# Altium PCB RSD_M1_MOTORCYCLE_UNIT_V2.PcbDoc
Units mm, origin at the board's own origin, x right, y up, seen from the top; angles counter-clockwise.
Board outline 67.4 x 33.8 mm, 4 copper layers (Top Layer, Signal Layer 1, Signal Layer 2, Bottom Layer), stack 0.778 mm thick; 54 components, 46 nets, 195 pads, 91 vias.
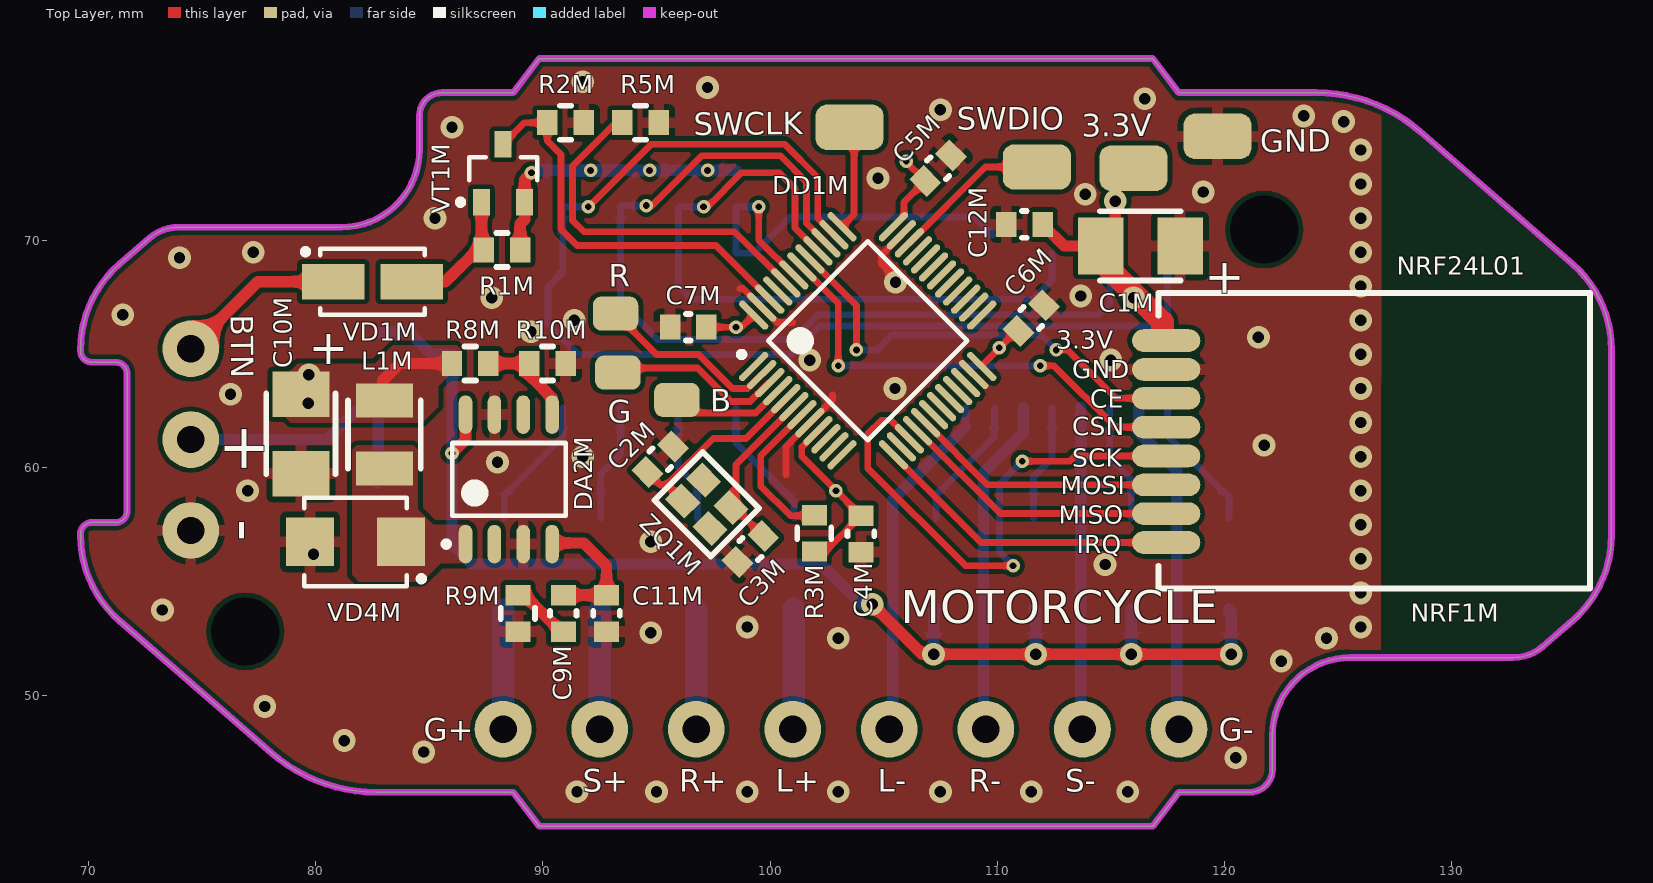
[diagram p0: Top Layer view]
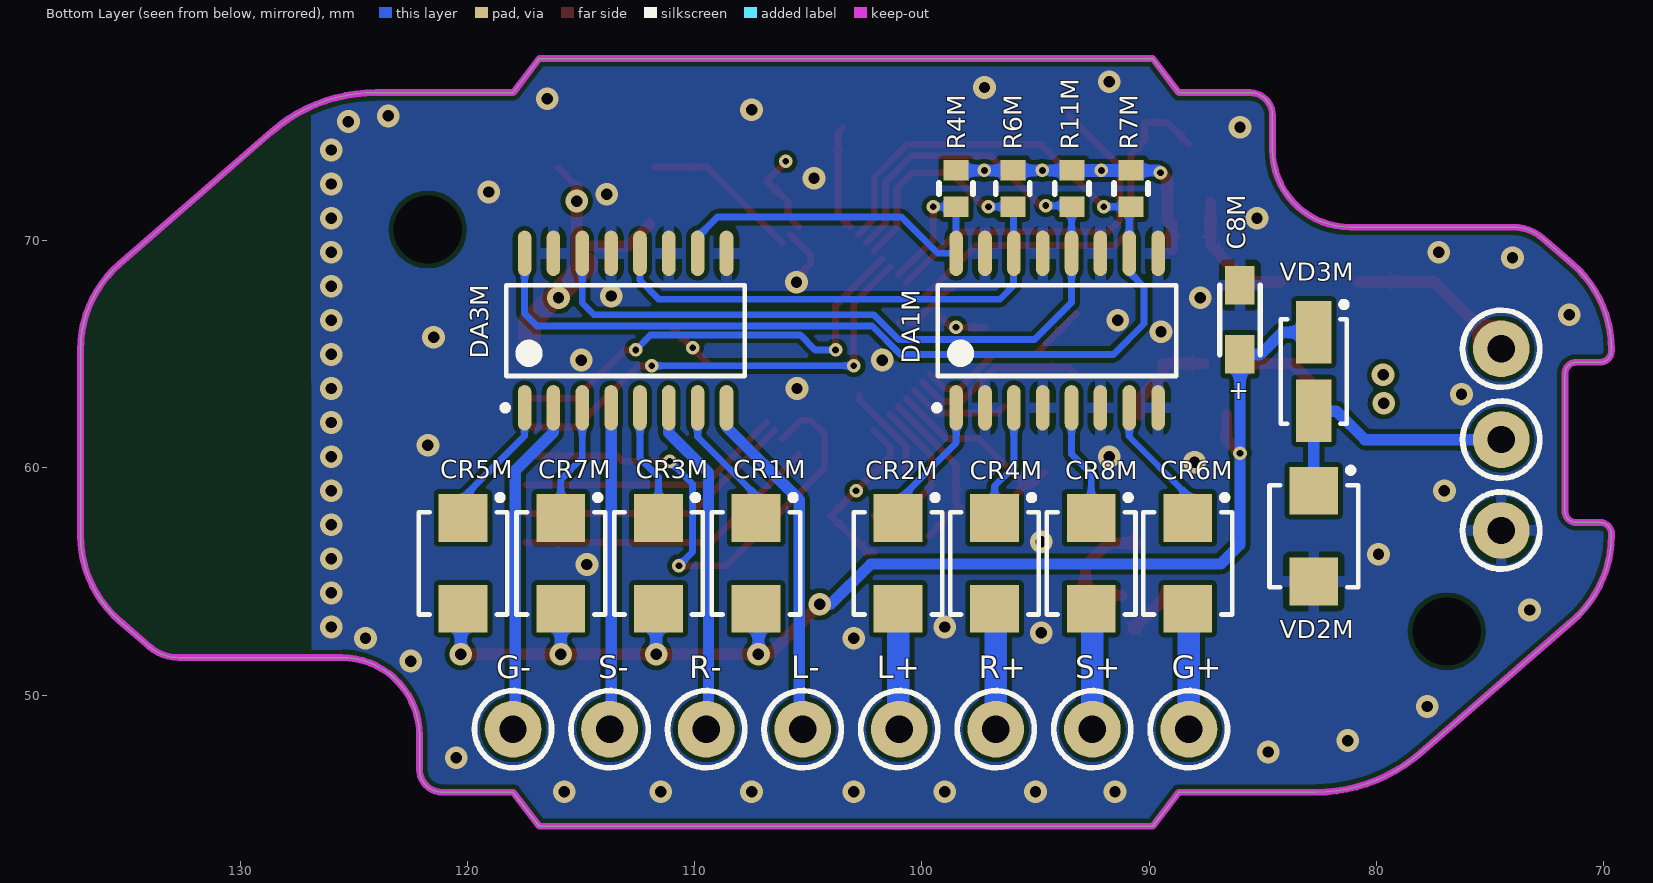
[diagram p1: Bottom Layer view, seen from below]
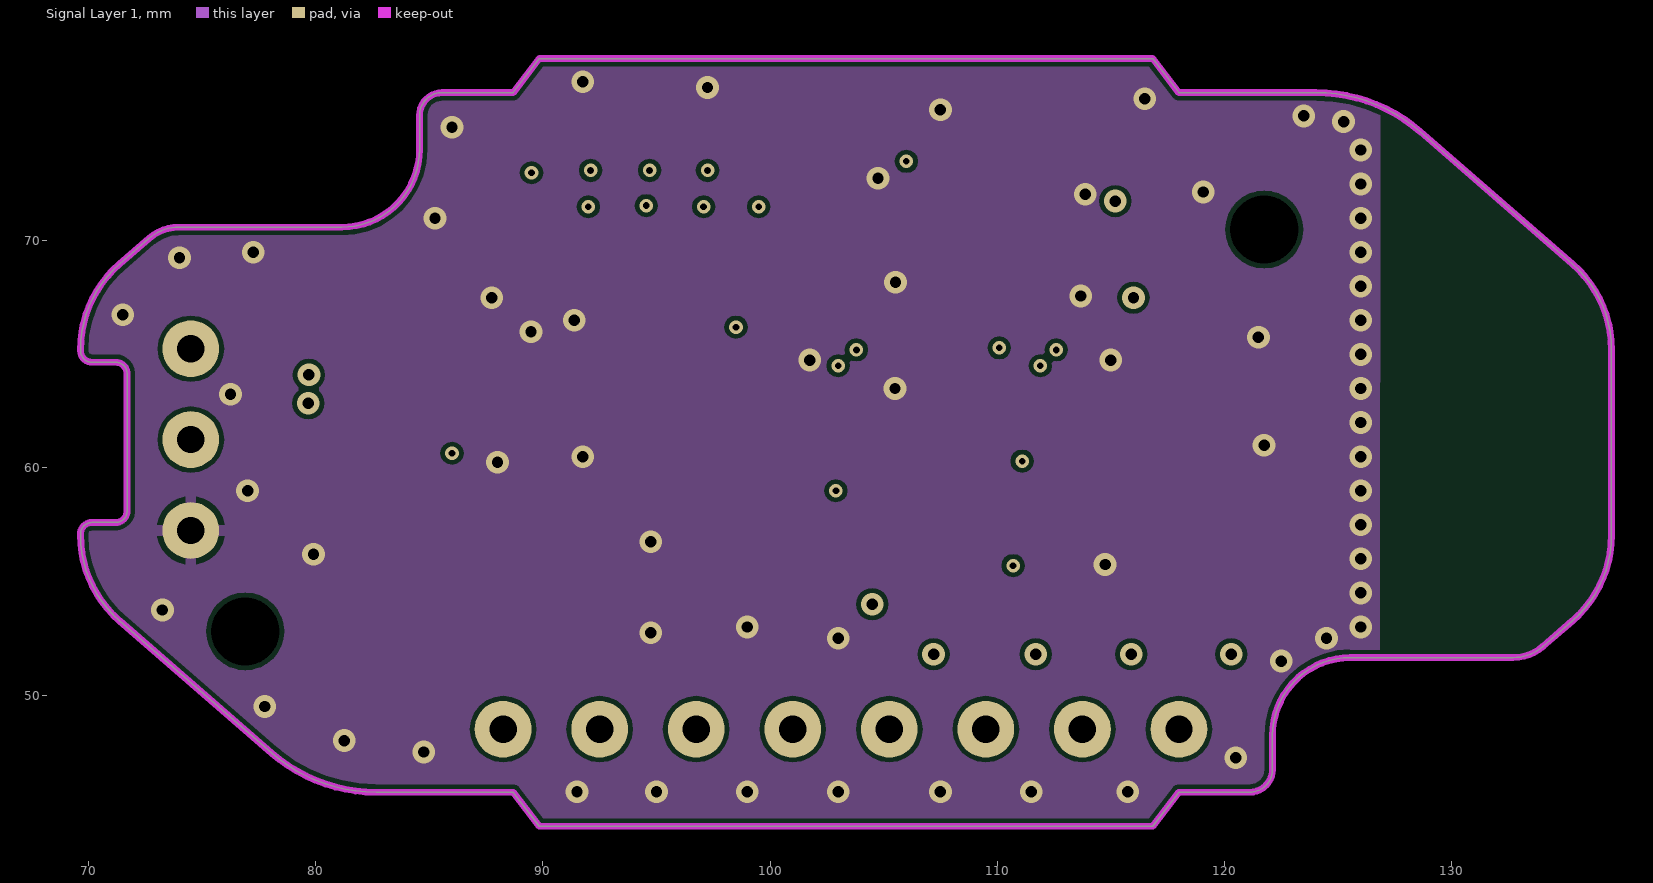
[diagram p2: Signal Layer 1]
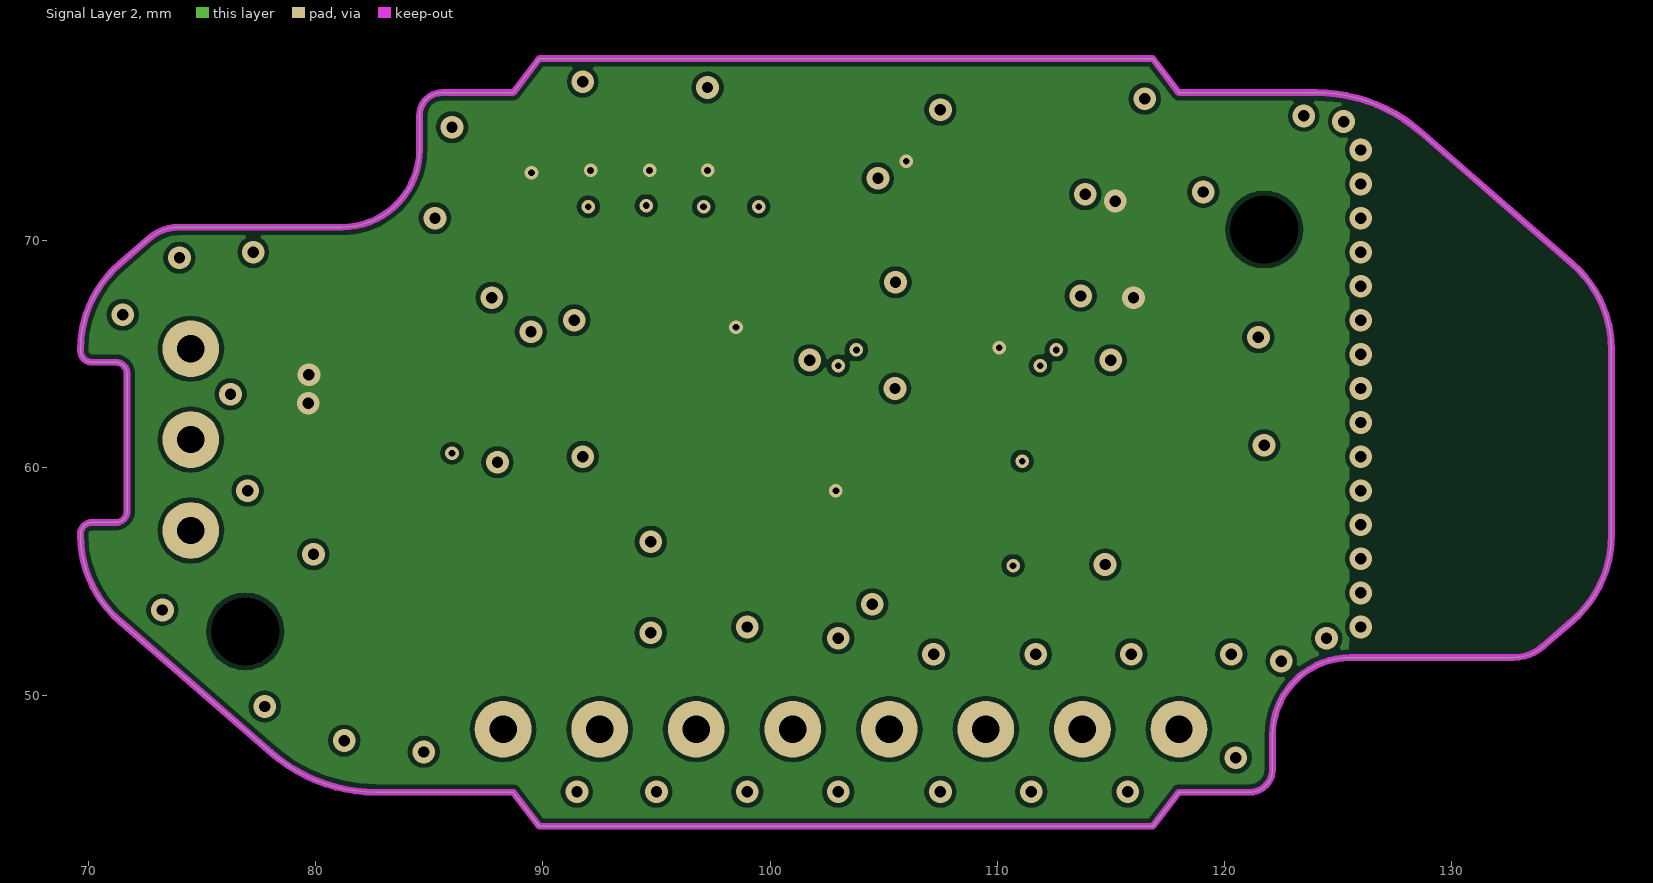
[diagram p3: Signal Layer 2]
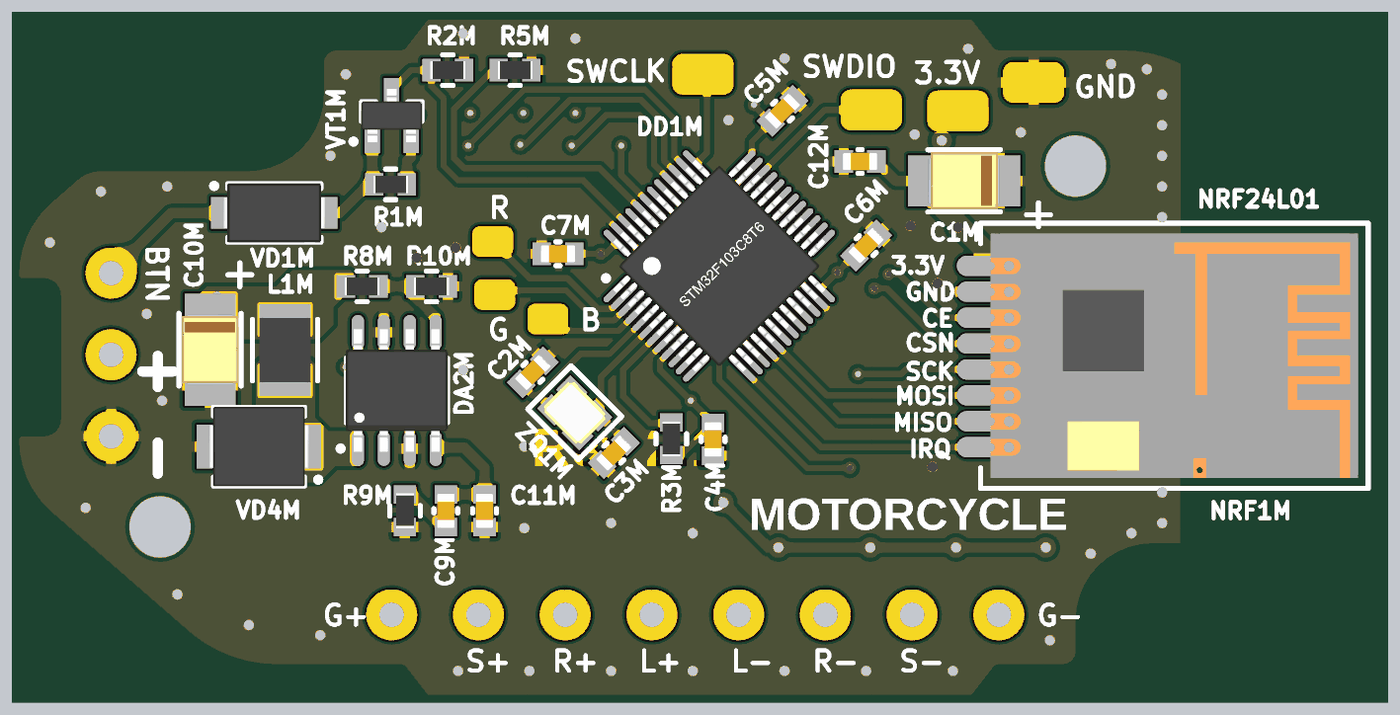
[diagram p4: 3D render of the assembled board from above, using the file's embedded part models]
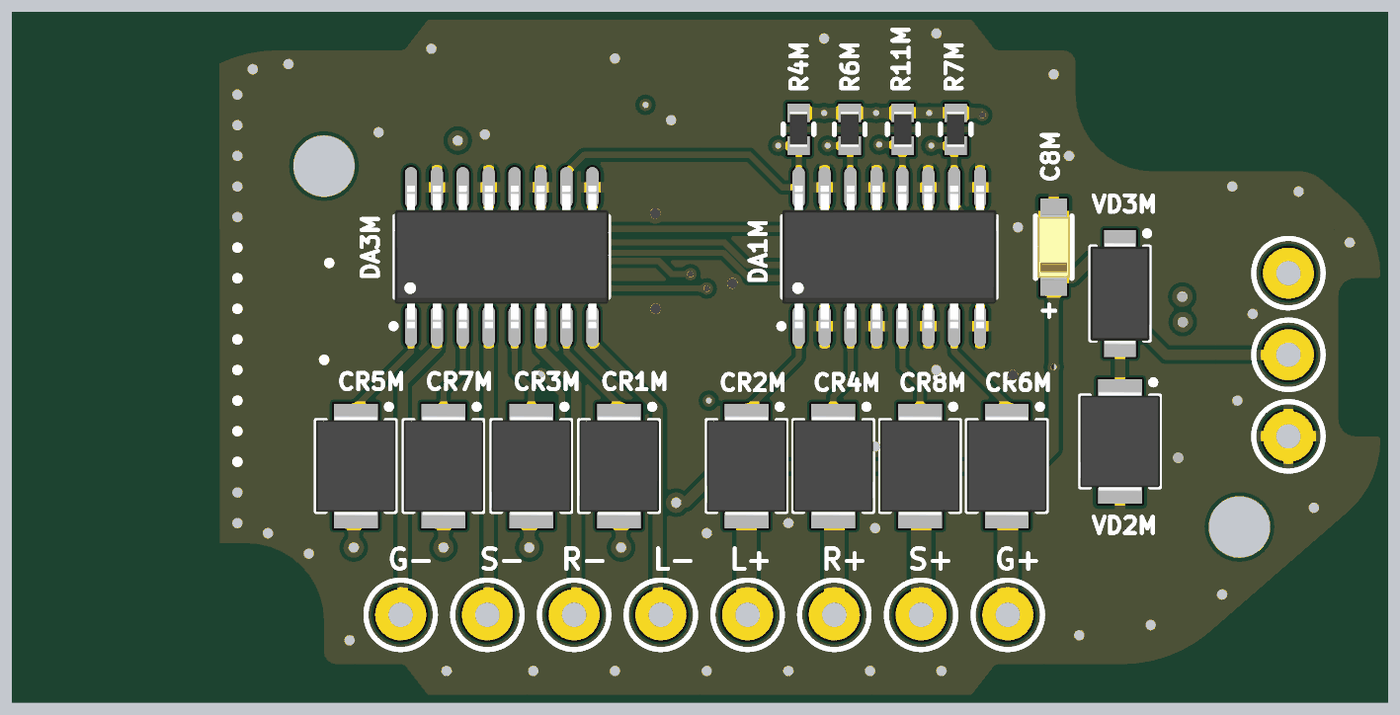
[diagram p5: 3D render of the assembled board from below, using the file's embedded part models]

## Layer stack, top to bottom
Top Solder: solder mask 0.0102, Solder Resist, Dk 3.5
Top Layer: signal copper 0.0356
Dielectric 1: core 0.254, FR-4, Dk 4.2
Signal Layer 1: signal copper 0.036
Dielectric 3: prepreg 0.127, Dk 4.2
Signal Layer 2: signal copper 0.036
Dielectric 2: core 0.254, Dk 4.2
Bottom Layer: signal copper 0.0356
Bottom Solder: solder mask 0.0102, Solder Resist, Dk 3.5

## Board outline
69.644,57.101 cw(c70.144,57.101) 70.144,57.601 71.194,57.601 ccw(c71.194,58.101) 71.694,58.101 71.694,64.154 ccw(c71.194,64.154) 71.194,64.654 70.144,64.654 cw(c70.144,65.154) 69.644,65.154 69.644,65.209 cw(c74.644,65.209) 71.364,68.982 72.663,70.112 cw(c73.975,68.602) 73.975,70.602 81.144,70.602 ccw(c81.144,74.027) 84.569,74.027 84.569,75.527 cw(c85.569,75.527) 85.569,76.527 88.685,76.527 89.844,78.027 116.844,78.027 118.004,76.527 124.028,76.527 cw(c124.028,69.527) 128.62,74.81 135.325,68.982 cw(c132.044,65.209) 137.044,65.209 137.044,57.046 cw(c132.044,57.046) 135.325,53.272 134.025,52.143 cw(c132.713,53.652) 132.713,51.652 125.544,51.652 ccw(c125.544,48.227) 122.119,48.227 122.119,46.727 cw(c121.119,46.727) 121.119,45.727 118.004,45.727 116.844,44.227 113.594,44.227 93.094,44.227 89.844,44.227 88.685,45.727 82.661,45.727 cw(c82.661,52.727) 78.068,47.444 71.364,53.272 cw(c74.644,57.046) 69.644,57.046

## Design rules (kind name [scope] priority, off if disabled: settings)
Clearance [All] p1: gap=0.1 ignorepadtopadclearanceinfootprint=FALSE except(0.2: Arc-Poly Track-Poly SMDPad-Poly THPad-Poly Via-Poly Fill-Poly Poly-Poly Poly-Region Poly-Text Poly-Hole)
ComponentClearance [All] p1: gap=0.1 collisioncheckmode=3 verticalgap=0.254 showdistances=FALSE
PolygonConnect [All] p1: thpad.connectstyle=Relief thpad.reliefconductorwidth=0.5 thpad.reliefentries=4 thpad.polygonreliefangle="90 Angle" thpad.airgapwidth=0.254 smdpad.connectstyle=Relief smdpad.reliefconductorwidth=0.5 smdpad.reliefentries=4 smdpad.polygonreliefangle="90 Angle" smdpad.airgapwidth=0.254 via.connectstyle=Direct via.reliefconductorwidth=0.254 via.reliefentries=4 via.polygonreliefangle="90 Angle" via.airgapwidth=0.254
RoutingVias [InNet('GND')] p1: holewidth=0.711 width=1.27 viastyle="Through Hole" minholewidth=0.711 minwidth=1.27 maxholewidth=0.711 maxwidth=1.27
SolderMaskExpansion [All] p1: expansion=0.102
Width [All] p1: maxlimit=5 minlimit=0.1 preferedwidth=0.3
29 further rules are at their usual default settings.

## Classes and differential pairs
component class RSD_M1_MOTORCYCLE_UNIT_V2: C1M C2M C3M C4M C5M C6M C7M C8M C9M C10M C11M C12M CR1M CR2M CR3M CR4M CR5M CR6M CR7M CR8M DA1M DA2M DA3M DD1M G- L1M L+ L- NRF1M R1M R2M R3M R4M R5M R6M R7M R8M R9M R10M R11M R+ R- S+ S- VD1M VD2M VD3M VD4M VT1M ZQ1M ""

## Components (designator, comment, footprint, x,y, rotation, side; value= is the part's Value field where it differs from the comment)
C1M "100 uf" tantal_case_B 116.3,69.775 r180 top value=T491B107M006AT
C2M "Capacitor" CAP0603 95.167,60.385 r225 top value="10 pF"
C3M "Capacitor" CAP0603 99.134,56.434 r45 top value="10 pF"
C4M "Capacitor" CAP0603 104,57.1 r90 top value="0.1 uF"
C5M "Capacitor" CAP0603 107.4,73.2 r225 top value="0.1 uF"
C6M "Capacitor" CAP0603 111.5,66.6 r225 top value="0.1 uF"
C7M "Capacitor" CAP0603 96.4,66.2 r0 top value="0.1 uF"
C8M "Capacitor_Polar" tantal_case_A 86,66.524 r90 bottom value=10uF
C9M "Capacitor" CAP0603 90.9,53.6 r90 top value="22 nF"
C10M "100 uf" tantal_case_B 79.35,61.5 r270 top value=T491B107M006AT
C11M "Capacitor" CAP0603 92.8,53.6 r90 top value="220 pF"
C12M "Capacitor" CAP0603 111.2,70.725 r180 top value="0.1 uF"
CR1M "NSIC20XX" SMB1 107.3,55.8 r270 bottom value=NSIC2050
CR2M "NSIC20XX" SMB1 101.05,55.8 r270 bottom value=NSIC2050
CR3M "NSIC20XX" SMB1 111.6,55.8 r270 bottom value=NSIC2050
CR4M "NSIC20XX" SMB1 96.8,55.8 r270 bottom value=NSIC2050
CR5M "NSIC20XX" SMB1 120.2,55.8 r270 bottom value=NSIC2050
CR6M "NSIC20XX" SMB1 88.3,55.8 r270 bottom value=NSIC2050
CR7M "NSIC20XX" SMB1 115.9,55.8 r270 bottom value=NSIC2050
CR8M "NSIC20XX" SMB1 92.55,55.8 r270 bottom value=NSIC2050
DA1M "TLP291-4" SOP16 94.05,66.05 r90 bottom
DA2M "LD5973AD" SOIC-8 88.5,59.5 r90 top
DA3M "TLP291-4" SOP16 113.05,66.05 r90 bottom
DD1M "STM32F103C8Tx" STM32F103C8T6 104.3,65.6 r45 top value=STM32F103C8T6
G+ "WIRE_CONNECT" WIRE_CONNECT 88.25,48.5 r180 bottom (schematic designator X7M)
G- "WIRE_CONNECT" WIRE_CONNECT 118,48.5 r180 bottom (schematic designator X8M)
L1M "coil" LQH3N 83.025,61.475 r90 top value="22 uH LQH3N" (schematic designator L1)
L+ "WIRE_CONNECT" WIRE_CONNECT 101,48.5 r180 bottom (schematic designator X3M)
L- "WIRE_CONNECT" WIRE_CONNECT 105.25,48.5 r180 bottom (schematic designator X4M)
NRF1M "NRF24L01" NRF24L01 118.6,61.2 r270 top
R1M "Resistor" Res0603 88.2,69.6 r180 top value="100 kOm"
R2M "Resistor" Res0603 91,75.2 r0 top value="100 kOm"
R3M "Resistor" Res0603 101.95,57.125 r270 top value="10 kOm"
R4M "Resistor" Res0603 98.5,72.3 r90 bottom value="1 kOm"
R5M "Resistor" Res0603 94.3,75.2 r0 top value="10 kOm"
R6M "Resistor" Res0603 96,72.3 r90 bottom value="1 kOm"
R7M "Resistor" Res0603 90.8,72.3 r90 bottom value="1 kOm"
R8M "Resistor" Res0603 86.8,64.6 r0 top value="5.6 kOm"
R9M "Resistor" Res0603 88.9,53.6 r270 top value="4.7 kOm"
R10M "Resistor" Res0603 90.2,64.6 r0 top value="3.3 kOm"
R11M "Resistor" Res0603 93.4,72.3 r90 bottom value="1 kOm"
R+ "WIRE_CONNECT" WIRE_CONNECT 96.75,48.5 r180 bottom (schematic designator X5M)
R- "WIRE_CONNECT" WIRE_CONNECT 109.5,48.5 r180 bottom (schematic designator X6M)
S+ "WIRE_CONNECT" WIRE_CONNECT 92.5,48.5 r180 bottom (schematic designator X9M)
S- "WIRE_CONNECT" WIRE_CONNECT 113.75,48.5 r180 bottom (schematic designator X10M)
VD1M "Diode" SMA-F 82.5,68.2 r0 top value=SS14
VD2M "Suppressor" SMB1 82.75,57 r270 bottom value=SMBJ18A
VD3M "Diode" SMA-F 82.75,64.25 r270 bottom value=SS14
VD4M "Schottky" SMB1 81.75,56.75 r180 top value=STPS340
VT1M "MOSFET-P" "SOT 23" 88.25,72.975 r90 top value=SI2301
X2M "WIRE_CONNECT" WIRE_CONNECT 74.5,65.25 r180 bottom
X11M "WIRE_CONNECT" WIRE_CONNECT 74.5,61.25 r180 bottom
X12M "WIRE_CONNECT" WIRE_CONNECT 74.5,57.25 r180 bottom
ZQ1M "Qartz" crystal 97.217,58.405 r135 top value=NX2520SA-16MHZ

## Footprints (in the part's own frame and the unit in brackets; to place one, negate y for a bottom-side part, rotate by r counter-clockwise, add the part's x,y. Pads: shape width x height; smd on the part's side, far side on the other; paste and mask are expansions set on the pad)
CAP0603 [mm]
  rect 0.9x1.1 smd: 1(-0.8,0) 2(0.8,0)
  silkscreen extent -0.1,-0.58 0.1,0.58, body extent -0.85,-0.43 0.85,0.43, height 0.9
crystal [mm]
  rect 1.2x1 smd: 1(-0.85,-0.65) 2(0.85,0.65) 3(0.85,-0.65) 4(-0.85,0.65)
  silkscreen extent -1.75,-1.5 1.75,1.5, body extent -1.3,-1.05 1.3,1.05, height 0.55
LQH3N [mm]
  rect 1.5x2.5 smd: 1(-1.5,0) 2(1.5,0)
  silkscreen extent -1.5,-1.6 1.5,1.6, body extent -1.6,-1.25 1.6,1.25, height 1.55
NRF24L01 [mm]
  oval 1x3 smd: 1(-4.41,-1.16) 2(-3.14,-1.16) 3(-1.87,-1.16) 4(-0.6,-1.16) 5(0.67,-1.16) 6(1.94,-1.16) 7(3.21,-1.16) 8(4.48,-1.16)
  silkscreen extent -6.5,-1.5 6.5,17.5, body extent -6,-1 6,17, height 0.8
Res0603 [mm]
  rect 0.9x1.1 smd: 1(-0.8,0) 2(0.8,0)
  silkscreen extent -0.25,-0.75 0.25,0.75, body extent -0.85,-0.43 0.85,0.43, height 0.5
SMA-F [mm] "Molded Diode, 2-Leads, Body 4,30x2,70mm, IPC Medium Density"
  rect 2.75x1.55 smd: 1(-1.725,0) 2(1.725,0)
  silkscreen extent -3.07,-1.45 2.3,1.45, body extent -2.52,-1.45 2.52,1.45, height 2.4
SMB1 [mm] "Molded Diode, 2-Leads, Body 4,25x3,60mm, IPC Medium Density"
  rect 2.1x2.15 smd: 1(-2,0) 2(2,0)
  silkscreen extent -3.02,-1.95 2.25,1.95, body extent -2.47,-1.95 2.47,1.95, height 1.8
SOIC-8 [mm] "SOIC, 8-Leads, Body 4,90x3,90mm, Pitch 1,27mm, IPC Medium Density"
  oval 1.7x0.6 smd: 1(-2.85,1.905) 2(-2.85,0.635) 3(-2.85,-0.635) 4(-2.85,-1.905) 5(2.85,-1.905) 6(2.85,-0.635) 7(2.85,0.635) 8(2.85,1.905)
  silkscreen extent -2.97,-2.5 1.6,2.88, body extent -3,-2.5 3,2.5, height 1.75
SOP16 [mm]
  oval 2x0.6 smd: 1(-3.4,4.445) 2(-3.4,3.175) 3(-3.4,1.905) 4(-3.4,0.635) 5(-3.4,-0.635) 6(-3.4,-1.905) 7(-3.4,-3.175) 8(-3.4,-4.445) 9(3.4,-4.445) 10(3.4,-3.175) 11(3.4,-1.905) 12(3.4,-0.635) 13(3.4,0.635) 14(3.4,1.905) 15(3.4,3.175) 16(3.4,4.445)
  silkscreen extent -3.52,-5.25 2,5.42, body extent -3.5,-5.25 3.5,5.25, height 2.1
"SOT 23" [mm] "SOT23, 3-Leads, Body 2,90x2,45mm, Pitch 0,95mm, IPC Medium Density"
  rect 1.15x0.75 smd: 1(-1.275,0.95) 2(-1.275,-0.95) 3(1.275,0)
  silkscreen extent -1.4,-1.5 0.7,2, body extent -1.3,-1.5 1.3,1.5, height 1.1
STM32F103C8T6 [mm]
  oval 1.7x0.3 smd: 1(-4.35,2.75) 2(-4.35,2.25) 3(-4.35,1.75) 4(-4.35,1.25) 5(-4.35,0.75) 6(-4.35,0.25) 7(-4.35,-0.25) 8(-4.35,-0.75) 9(-4.35,-1.25) 10(-4.35,-1.75) 11(-4.35,-2.25) 12(-4.35,-2.75) 25(4.35,-2.75) 26(4.35,-2.25) 27(4.35,-1.75) 28(4.35,-1.25) 29(4.35,-0.75) 30(4.35,-0.25) 31(4.35,0.25) 32(4.35,0.75) 33(4.35,1.25) 34(4.35,1.75) 35(4.35,2.25) 36(4.35,2.75)
  oval 0.3x1.7 smd: 13(-2.75,-4.35) 14(-2.25,-4.35) 15(-1.75,-4.35) 16(-1.25,-4.35) 17(-0.75,-4.35) 18(-0.25,-4.35) 19(0.25,-4.35) 20(0.75,-4.35) 21(1.25,-4.35) 22(1.75,-4.35) 23(2.25,-4.35) 24(2.75,-4.35) 37(2.75,4.35) 38(2.25,4.35) 39(1.75,4.35) 40(1.25,4.35) 41(0.75,4.35) 42(0.25,4.35) 43(-0.25,4.35) 44(-0.75,4.35) 45(-1.25,4.35) 46(-1.75,4.35) 47(-2.25,4.35) 48(-2.75,4.35)
  silkscreen extent -4.47,-3.1 3.1,3.62, body extent -4.5,-4.5 4.5,4.5, height 1.6
tantal_case_A [mm]
  rect 1.7x1.3 smd: 1(-1.524,0) 2(1.524,0)
  silkscreen extent -1.52,-0.89 1.52,0.89, body extent -1.6,-0.8 1.6,0.8, height 1.8
tantal_case_B [mm]
  rect 2x2.5 smd: 1(-1.75,0) 2(1.75,0)
  silkscreen extent -1.78,-1.52 1.78,1.52, body extent -1.75,-1.4 1.75,1.4, height 2.1
WIRE_CONNECT [mm]
  round 2.5 hole 1.2: 1(0,0)
  silkscreen extent -1.7,-1.7 1.7,1.7

## Part data
C1M C10M: library part Capacitor_Polar
L1M: PN=LQH3NPN220MMEL

## Free pads (board coordinates)
  rrect50% 2x1.5 smd paste-5: 2(93.2,66.8) 2(93.3,64.2) 2(95.9,63)
  rrect50% 3x2 smd paste-5: 2(103.5,75) 2(111.75,73.25) 2(116,73.2) 2(119.7,74.6)
  round 0 hole 3: 3(76.898,52.807) 3(121.756,70.498)

## Via types
v1: diameter 1, hole 0.5, Top Layer to Bottom Layer, tented both sides, 72 vias
v2: diameter 0.6, hole 0.3, Top Layer to Bottom Layer, tented both sides, 19 vias

## Nets (pads, with @x,y where several pads share a name; then routed paths per layer and width w, separated by ;. In a path a pad name is that pad's centre, name@x,y a point inside that pad or via, vN(x,y) a via of type N, cw(c..) or ccw(c..) an arc to the next point about the centre after c; other vN are vias at no path point)
3.3V: C1M.2 C4M.2 C5M.2 C6M.2 C7M.2 C10M.1 C12M.1 DD1M.9 DD1M.24 DD1M.36 DD1M.48 L1M.2 NRF1M.1 pad.2@116,73.2 R1M.1 R3M.2 R4M.2 R6M.2 R7M.2 R8M.1 R11M.2 VT1M.2 | length 45.3
  Top Layer w0.3: C7M.2 v2(98.5,66.2) 98.748,66.2 DD1M.48 ; R3M.2@102.1,56.3 102.4,56.3 C4M.2@103.95,57.85 ; DD1M.9 101.572,61.104 101.574,61.104 101.4,60.93 101.4,60.5 v2(102.9,59) C4M.2 ; DD1M.36 105.9,71.089 105.9,71.7 C5M.2 v2@105.9,73.569 ; DD1M.24@109.3,64.5 v2(110.093,65.291) 110.885,66.082 C6M.2@111,66.2 ; pad.2@115.2,72.4 pad.2@116,73.2
  Top Layer w0.5: L1M.2@82.95,62.95 82.95,63.85 83.7,64.6 R8M.1 ; R1M.1 89,70.75 89.2,70.95 VT1M.2 89.2,72.7 v2(89.5,73) ; C12M.1 112.95,69.775 C1M.2 ; C1M.2@115.2,68.8 v1(115.2,71.75) pad.2@115.2,72.4
  Top Layer w0.58: NRF1M.1@117.275,65.775 NRF1M.1
  Top Layer w1: C1M.2@114.75,69 114.75,68.95 117.275,66.425 NRF1M.1@117.275,65.775
  Bottom Layer w0.3: v2(89.5,73) v2@89.6,73.1
  Bottom Layer w0.5: v2@89.6,73.1 R7M.2 ; R11M.2 v2(94.7,73.1) R6M.2 v2(97.25,73.1) R4M.2
  Bottom Layer w0.56: R7M.2 v2(92.1,73.1) R11M.2
  other v1: 79.675,62.85 79.7,64.1 116,67.5
  other v2: 106,73.5
12V: C8M.1 CR1M.2 CR3M.2 CR5M.2 CR7M.2 DA2M.8 VD3M.1 | length 58.5
  Top Layer w0.5: v2(86,60.65) 86.595,61.245 DA2M.8 ; v1(104.5,54) 106.7,51.8 v1(107.2,51.8) v1(111.7,51.8) v1(115.9,51.8) v1(120.3,51.8)
  Bottom Layer w0.3: CR5M.2@120.2,53.6 CR5M.2@120.3,53.5
  Bottom Layer w0.5: VD3M.1 84.125,65.975 85.1,65 C8M.1 v2(86,60.65) 86,56.625 86.85,55.775 102.25,55.775 104.025,54 v1(104.5,54) ; v1(107.2,51.8) 107.2,53.7 CR1M.2 ; CR3M.2 111.7,53.7 v1(111.7,51.8) ; v1(115.9,51.8) CR7M.2 ; CR5M.2@120.2,53.6 120.3,53.7 CR5M.2 ; v1(120.3,51.8) CR5M.2@120.3,53.5
BLUE: DD1M.4 pad.2@95.9,63 | length 4.5
  Top Layer w0.3: pad.2@96.4,62.7 96.675,62.425 99.357,62.425 DD1M.4
CE: DD1M.41 NRF1M.3 | length 19.9
  Top Layer w0.3: DD1M.41 103.8,67.161 v2(103.8,65.2) ; v2(112.6,65.2) 113.1,65.2 115.23,63.07 NRF1M.3
  Bottom Layer w0.3: v2(103.8,65.2) 104.7,65.2 105.35,65.85 111.95,65.85 v2(112.6,65.2)
CONNECT: DD1M.46 R2M.1 VT1M.3 | length 17.7
  Top Layer w0.3: VT1M.3 89.2,75.2 R2M.1 90.2,74.4 90.8,73.8 90.8,70.5 91.5,69.8 97.625,69.8 DD1M.46
CSN: DD1M.42 NRF1M.4 | length 20.6
  Top Layer w0.3: DD1M.42 103,67.254 v2(103,64.5) ; v2(111.9,64.5) 112.5,64.5 115.2,61.8 NRF1M.4
  Bottom Layer w0.3: v2(103,64.5) v2(111.9,64.5)
GABARIT: DA1M.10 DA3M.16 DD1M.38 R7M.1 | length 52.5
  Top Layer w0.3: v2(92,71.5) 94.75,74.25 100.65,74.25 102.1,72.8 102.1,70.982 DD1M.38
  Bottom Layer w0.3: v2(92,71.5) R7M.1 90.875,71.425 DA1M.10 90.875,68.625 90.225,67.975 90.225,66.35 91.575,65 100.939,65 102.189,66.25 116.95,66.25 117.495,66.795 DA3M.16
GABARIT+: CR6M.2 G+.1 | length 5.3
  Bottom Layer w0.3: CR6M.2@88.25,53.75 CR6M.2
  Bottom Layer w1: G+.1 CR6M.2@88.25,53.75
GABARIT-: DA3M.2 G-.1 | length 14.9
  Bottom Layer w0.3: G-.1@117.9,48.6 G-.1
  Bottom Layer w0.5: DA3M.2 116.225,61.575 117.9,59.9 G-.1@117.9,48.6
GND: C1M.1 C2M.1 C3M.1 C4M.1 C5M.1 C6M.1 C7M.1 C8M.2 C10M.2 C11M.1 C12M.2 DA1M.2 DA1M.4 DA1M.6 DA1M.8 DA1M.9 DA1M.11 DA1M.13 DA1M.15 DA2M.3 DA2M.7 DA3M.9 DA3M.11 DA3M.13 DA3M.15 DD1M.8 DD1M.23 DD1M.35 DD1M.47 NRF1M.2 pad.2@119.7,74.6 R2M.2 R5M.2 R9M.2 R10M.2 VD2M.2 VD4M.2 X12M.1 | length 9.8
  Top Layer w0.3: 98.675,67.9 98.818,67.9 DD1M.47 100.318,66.4 101,66.4 ; 100.7,59.7 100.7,60.939 DD1M.8 102.75,62.989 102.75,63.225 ; v1@105.3,68.3 105.3,68.6 104.9,69 104.9,69.382 DD1M.35
  other v1: 91.5,45.75 95,45.75 99,45.75 103,45.75 107.5,45.75 111.5,45.75 115.75,45.75 120.5,47.25 84.75,47.5 81.25,48 77.75,49.5 122.5,51.5 103,52.5 124.5,52.5 94.75,52.75 99,53 126,53 73.25,53.75 126,54.5 114.75,55.75 126,56 79.9,56.2 94.75,56.75 126,57.5 77,59 126,59 88,60.25 91.75,60.5 126,60.5 121.75,61 126,62 76.25,63.25 105.5,63.5 126,63.5 101.75,64.75 115,64.75 126,65 121.5,65.75 89.475,66 91.375,66.5 126,66.5 71.5,66.75 87.75,67.5 113.675,67.575 126,68 105.525,68.175 74,69.25 77.25,69.5 126,69.5 85.25,71 126,71 113.875,72.05 119.075,72.15 126,72.5 104.75,72.75 126,74 86,75 125.25,75.25 123.5,75.5 107.5,75.775 116.5,76.25 97.25,76.75 91.75,77
GREEN: DD1M.3 pad.2@93.3,64.2 | length 7.7
  Top Layer w0.3: pad.2@93.3,64.2 93.5,64.4 96.8,64.4 98.275,62.925 99.125,62.925 99.962,63.762 DD1M.3
IRQ: DD1M.13 NRF1M.8 | length 13.6
  Top Layer w0.3: DD1M.13 109.291,56.72 NRF1M.8
LEFT: DA1M.16 DA3M.10 DD1M.43 R4M.1 | length 19
  Top Layer w0.3: v2(99.5,71.5) 99.5,70.046 DD1M.43
  Bottom Layer w0.3: v2(99.5,71.5) R4M.1 98.495,71.495 DA1M.16 99.3,69.45 100.9,71.05 109,71.05 DA3M.10@109.8,70.25
LEFT+: CR2M.2 L+.1 | length 5.3
  Bottom Layer w0.3: L+.1 L+.1@101.05,48.55
  Bottom Layer w1: L+.1@101.05,48.55 CR2M.2
LEFT-: DA3M.8 L-.1 | length 15.5
  Bottom Layer w0.3: 105.4,54.378 105.404,54.374 ; L-.1@105.404,48.596 L-.1@105.5,48.5 ; DA3M.8@108.605,61.805 DA3M.8
  Bottom Layer w0.5: 105.4,54.378 105.4,58.6 DA3M.8@108.605,61.805 ; L-.1@105.404,48.596 105.404,54.374
MISO: DD1M.16 NRF1M.7 | length 12.5
  Top Layer w0.3: DD1M.16 110.142,57.99 NRF1M.7
MOSI: DD1M.17 NRF1M.6 | length 11.7
  Top Layer w0.3: DD1M.17 109.579,59.26 NRF1M.6
NetC2M_2: C2M.2 DD1M.5 ZQ1M.2 | length 8.9
  Top Layer w0.3: C2M.2 95.169,59.251 95.451,59.251 ; ZQ1M.2 95.451,59.251 ; DD1M.5 98.939,61.3 97.5,61.3 95.451,59.251
NetC3M_2: C3M.2 DD1M.6 ZQ1M.1 | length 7.5
  Top Layer w0.3: C3M.2 98.436,58.264 ZQ1M.1 98.5,58.486 98.5,60.154 DD1M.6
NetC9M_1: C9M.1 R9M.1 | length 2.3
  Top Layer w0.5: R9M.1@89.1,54.5 C9M.1@90.7,52.9
NetC9M_2: C9M.2 C11M.2 DA2M.4 | length 5.3
  Top Layer w0.5: DA2M.4@90.5,56.7 91.8,56.7 92.8,55.7 C11M.2 ; C9M.2@91.2,54.4 C11M.2@92.5,54.4
NetCR1M_K: CR1M.1 DA3M.7 | length 5.9
  Bottom Layer w0.3: CR1M.1 107.3,58.8 109.875,61.375 DA3M.7
NetCR2M_K: CR2M.1 DA1M.1 | length 5.9
  Bottom Layer w0.3: DA1M.1 98.495,61.105 101.05,58.55 CR2M.1
NetCR3M_K: CR3M.1 DA3M.5 | length 5.2
  Bottom Layer w0.3: CR3M.1 111.6,59.6 112.415,60.415 DA3M.5
NetCR4M_K: CR4M.1 DA1M.3 | length 5.2
  Bottom Layer w0.3: DA1M.3 95.955,60.045 96.8,59.2 CR4M.1
NetCR5M_K: CR5M.1 DA3M.1 | length 6
  Bottom Layer w0.3: DA3M.1 117.495,61.405 120.2,58.7 CR5M.1
NetCR6M_K: CR6M.1 DA1M.7 | length 5.9
  Bottom Layer w0.3: CR6M.1 88.3,58.8 90.875,61.375 DA1M.7
NetCR7M_K: CR7M.1 DA3M.3 | length 5.2
  Bottom Layer w0.3: DA3M.3 114.955,60.445 115.9,59.5 CR7M.1
NetCR8M_K: CR8M.1 DA1M.5 | length 5.2
  Bottom Layer w0.3: CR8M.1 92.55,59.75 93.415,60.615 DA1M.5
NetDA2M_1: DA2M.1 L1M.1 VD4M.1
NetDA2M_5: DA2M.5 R8M.2 R10M.1 | length 4.5
  Top Layer w0.5: R8M.2 R10M.1 89.4,64.1 90.405,63.095 DA2M.5
NetDD1M_7: DD1M.7 R3M.1 | length 6.9
  Top Layer w0.3: DD1M.7 99.588,60.535 99.588,59.212 100.9,57.9 R3M.1@102.1,57.9
NetDD1M_44: DD1M.44 R5M.1 | length 16
  Top Layer w0.3: R5M.1@93.5,75.5 91.3,73.3 91.3,70.9 91.8,70.4 98.439,70.4 DD1M.44
NetR1M_2: R1M.2 VD1M.2 VT1M.1 | length 5.6
  Top Layer w0.5: VD1M.2 85.7,68.2 87.3,69.8 VT1M.1
NetVD1M_1: VD1M.1 X2M.1 | length 7.5
  Top Layer w0.5: X2M.1 77.45,68.2 VD1M.1
NetVD2M_1: VD2M.1 VD3M.2 X11M.1 | length 11.9
  Bottom Layer w0.5: X11M.1 80.5,61.25 81.75,62.5 82.75,62.5 VD2M.1@82.75,59.325
RED: DD1M.2 pad.2@93.2,66.8 | length 8.1
  Top Layer w0.3: pad.2@93.2,66.8 95,65 96.85,65 98.35,63.5 99.018,63.5 DD1M.2
RIGHT: DA1M.14 DA3M.12 DD1M.40 R6M.1 | length 30.9
  Top Layer w0.3: v2(97.075,71.5) 97.25,71.5 98.75,73 100.4,73 101.1,72.3 101.1,70.568 DD1M.40
  Bottom Layer w0.3: R6M.1@95.955,71.455 R6M.1 v2(97.075,71.5) ; R6M.1@95.975,71.455 95.975,68.025 96.575,67.425 111.575,67.425 112.415,68.265 DA3M.12
RIGHT+: CR4M.2 R+.1 | length 5.3
  Bottom Layer w0.3: CR4M.2@96.75,53.75 CR4M.2
  Bottom Layer w1: R+.1 CR4M.2@96.75,53.75
RIGHT-: DA3M.6 R-.1 | length 14.9
  Bottom Layer w0.3: R-.1@109.4,48.6 R-.1
  Bottom Layer w0.5: R-.1@109.4,48.6 109.4,59.8 111.145,61.545 DA3M.6
SCK: DD1M.15 NRF1M.5 | length 23.8
  Top Layer w0.3: DD1M.15 105.325,62.1 104.9,62.1 104.3,61.5 104.3,60 108.6,55.7 v2(110.7,55.7) ; v2(111.1,60.3) 113.2,60.3 113.43,60.53 NRF1M.5
  Bottom Layer w0.3: v2(110.7,55.7) 110.1,56.3 110.1,59.3 v2(111.1,60.3)
STOP: DA1M.12 DA3M.14 DD1M.39 R11M.1 | length 42
  Top Layer w0.3: v2(94.55,71.55) 94.8,71.55 97,73.75 100.45,73.75 101.6,72.6 101.6,70.775 DD1M.39
  Bottom Layer w0.3: v2(94.55,71.55) 93.45,71.55 R11M.1 93.415,71.485 DA1M.12 93.415,67.285 95.05,65.65 101.024,65.65 102.124,66.75 114.45,66.75 114.955,67.255 DA3M.14
STOP+: CR8M.2 S+.1 | length 5.3
  Bottom Layer w0.3: CR8M.2@92.5,53.75 CR8M.2
  Bottom Layer w1: S+.1 CR8M.2@92.5,53.75
STOP-: DA3M.4 S-.1 | length 14.2
  Bottom Layer w0.3: S-.1@113.685,48.565 S-.1
  Bottom Layer w0.5: S-.1@113.685,48.565 DA3M.4
SWCLK: DD1M.37 pad.2@103.5,75 | length 4.7
  Top Layer w0.3: DD1M.37 103.7,71.152 103.7,74.8 pad.2@103.5,75
SWDIO: DD1M.34 pad.2@111.75,73.25 | length 7
  Top Layer w0.3: DD1M.34 109.475,73.25 pad.2@111.75,73.25
pads on no net: DA2M.2 DA2M.6 DD1M.1 DD1M.10 DD1M.11 DD1M.12 DD1M.14 DD1M.18 DD1M.19 DD1M.20 DD1M.21 DD1M.22 DD1M.25 DD1M.26 DD1M.27 DD1M.28 DD1M.29 DD1M.30 DD1M.31 DD1M.32 DD1M.33 DD1M.45 ZQ1M.3 ZQ1M.4

## Polygon pours and split planes (outlines as drawn)
GND on Top Layer "Top Layer, Top-No Net" (solid, pour order 36): 69.655,57.117 cw(c70.155,57.117) 70.155,57.617 71.205,57.617 ccw(c71.205,58.117) 71.705,58.117 71.705,64.17 ccw(c71.205,64.17) 71.205,64.67 70.155,64.67 cw(c70.155,65.17) 69.655,65.17 69.655,65.225 cw(c74.655,65.225) 71.374,68.999 72.674,70.128 cw(c73.986,68.619) 73.986,70.619 81.155,70.619 ccw(c81.155,74.044) 84.58,74.044 84.58,75.544 cw(c85.58,75.544) 85.58,76.544 88.695,76.544 89.855,78.044 116.855,78.044 118.014,76.544 124.038,76.544 cw(c124.642,72.394) 126.909,75.922 126.88,51.665 125.555,51.669 ccw(c125.554,48.244) 122.13,48.244 122.13,46.744 cw(c121.13,46.744) 121.13,45.744 118.014,45.744 116.855,44.244 113.605,44.244 93.105,44.244 89.855,44.244 88.695,45.744 82.671,45.744 cw(c82.671,52.744) 78.079,47.461 71.374,53.289 cw(c74.655,57.062) 69.655,57.062
3.3V on Top Layer "Top Layer, Top-No Net" (solid, pour order 26): 85.4,62.7 85.4,63.6 85.9,64.1 86.4,64.1 86.4,65.2 86.2,65.4 83.4,65.4 82.6,64.6 79.2,64.6 78.7,64.1 78.7,62.2 78.9,62 84.7,62
NetDA2M_1 on Top Layer "Top Layer, Top-No Net" (solid, pour order 24): 86.7,57.5 86.7,55.8 85.5,55.8 84.7,55 81.9,55 81.6,55.3 81.6,60.8 81.8,61 84.3,61 84.5,60.8 84.5,58.175 85.175,57.5
3.3V on Signal Layer 2 "Top Layer, Top-No Net" (solid, pour order 44): 69.588,57.095 cw(c70.088,57.095) 70.088,57.595 71.138,57.595 ccw(c71.138,58.095) 71.638,58.095 71.638,64.148 ccw(c71.138,64.148) 71.138,64.648 70.088,64.648 cw(c70.088,65.148) 69.588,65.148 69.588,65.203 cw(c74.588,65.203) 71.308,68.976 72.607,70.106 cw(c73.919,68.596) 73.919,70.596 81.088,70.596 ccw(c81.088,74.021) 84.513,74.021 84.513,75.521 cw(c85.513,75.521) 85.513,76.521 88.628,76.521 89.788,78.021 116.788,78.021 117.947,76.521 123.971,76.521 cw(c124.576,72.372) 125.518,76.458 125.488,51.646 ccw(c125.488,48.221) 122.063,48.221 122.063,46.721 cw(c121.063,46.721) 121.063,45.721 117.947,45.721 116.788,44.221 113.538,44.221 93.038,44.221 89.788,44.221 88.628,45.721 82.604,45.721 cw(c82.604,52.721) 78.012,47.438 71.307,53.266 cw(c74.588,57.04) 69.588,57.04
GND on Signal Layer 1 "Top Layer, Top-No Net" (solid, pour order 42): 69.61,57.099 cw(c70.11,57.099) 70.11,57.599 71.16,57.599 ccw(c71.16,58.099) 71.66,58.099 71.66,64.152 ccw(c71.16,64.152) 71.16,64.652 70.11,64.652 cw(c70.11,65.152) 69.61,65.152 69.61,65.206 cw(c74.61,65.206) 71.33,68.98 72.629,70.11 cw(c73.941,68.6) 73.941,70.6 81.11,70.6 ccw(c81.11,74.025) 84.535,74.025 84.535,75.525 cw(c85.535,75.525) 85.535,76.525 88.651,76.525 89.81,78.025 116.81,78.025 117.97,76.525 123.994,76.525 cw(c124.598,72.376) 126.864,75.904 126.835,51.647 125.51,51.65 ccw(c125.51,48.225) 122.085,48.225 122.085,46.725 cw(c121.085,46.725) 121.085,45.725 117.97,45.725 116.81,44.225 113.56,44.225 93.06,44.225 89.81,44.225 88.651,45.725 82.627,45.725 cw(c82.627,52.725) 78.034,47.442 71.33,53.27 cw(c74.61,57.044) 69.61,57.044
GND on Bottom Layer "Top Layer, Top-No Net" (solid, pour order 40): 69.629,57.094 cw(c70.129,57.094) 70.129,57.594 71.179,57.594 ccw(c71.179,58.094) 71.679,58.094 71.679,64.147 ccw(c71.179,64.147) 71.179,64.647 70.129,64.647 cw(c70.129,65.147) 69.629,65.147 69.629,65.202 cw(c74.629,65.202) 71.348,68.975 72.648,70.105 cw(c73.96,68.595) 73.96,70.595 81.129,70.595 ccw(c81.129,74.02) 84.554,74.02 84.554,75.52 cw(c85.554,75.52) 85.554,76.52 88.669,76.52 89.829,78.02 116.829,78.02 117.988,76.52 124.012,76.52 cw(c124.616,72.371) 126.883,75.899 126.854,51.642 125.529,51.645 ccw(c125.529,48.22) 122.104,48.22 122.104,46.72 cw(c121.104,46.72) 121.104,45.72 117.988,45.72 116.829,44.22 113.579,44.22 93.079,44.22 89.829,44.22 88.669,45.72 82.645,45.72 cw(c82.645,52.72) 78.053,47.437 71.348,53.265 cw(c74.629,57.039) 69.629,57.039

## Keep-outs
Keep-Out Layer:
  lines w0.3: 69.644,57.046 ccw(c74.644,57.046) 71.364,53.272 78.068,47.444 ccw(c82.661,52.727) 82.661,45.727 88.685,45.727 89.844,44.227 93.094,44.227 102.644,44.227 113.594,44.227 116.844,44.227 118.004,45.727 121.119,45.727 ccw(c121.119,46.727) 122.119,46.727 122.119,48.227 cw(c125.544,48.227) 125.544,51.652 132.713,51.652 ccw(c132.713,53.652) 134.025,52.143 135.325,53.272 ccw(c132.044,57.046) 137.044,57.046 137.044,61.127 137.044,65.209 ccw(c132.044,65.209) 135.325,68.982 128.62,74.81 ccw(c124.028,69.527) 124.028,76.527 118.004,76.527 116.844,78.027 103.344,78.027 89.844,78.027 88.685,76.527 85.569,76.527 ccw(c85.569,75.527) 84.569,75.527 84.569,74.027 cw(c81.144,74.027) 81.144,70.602 73.975,70.602 ccw(c73.975,68.602) 72.663,70.112 71.364,68.982 ccw(c74.644,65.209) 69.644,65.209 69.644,65.154 ccw(c70.144,65.154) 70.144,64.654 71.194,64.654 cw(c71.194,64.154) 71.694,64.154 71.694,61.127 71.694,58.101 cw(c71.194,58.101) 71.194,57.601 70.144,57.601 ccw(c70.144,57.101) 69.644,57.101 69.644,57.046

## Silkscreen, mask and mechanical layers (free items; w line width, h text height)
Top Overlay:
  text "SWDIO" at 108.225,74.9 h1
  text "SWCLK" at 96.65,74.65 h1 r0.5
  text "3.3V" at 113.725,74.575 h1 r0.5
  text "GND" at 121.575,73.9 h1 r0.5
  text "R" at 92.9,67.975 h1 r0.5
  text "BTN" at 76.25,66.75 h1 r270.5
  text "B" at 97.375,62.475 h1 r0.5
  text "+" at 76,62 h2 r270
  text "G" at 92.85,62 h1 r0.5
  text "-" at 76,57.75 h2 r270
  text "MOTORCYCLE" at 105.75,52.675 h2.5
  text "G+" at 84.75,48 h1
  text "G-" at 119.75,48 h1
  text "S+" at 91.75,45.75 h1
  text "R+" at 96,45.75 h1
  text "L+" at 100.25,45.75 h1
  text "L-" at 104.75,45.75 h1
  text "R-" at 108.75,45.75 h1
  text "S-" at 113,45.75 h1
Top Solder:
  text "Rev 2.1" at 95.1,55.8 h3
Mechanical 8:
  circle w0.3: c76.9,52.8 r2.1
  circle w0.3: c121.75,70.5 r2.1
  lines w0.3: 74.95,52.8 78.85,52.8 ; 76.9,50.85 76.9,54.75 ; 119.93,70.5 123.57,70.5 ; 121.75,68.68 121.75,72.32

## Text inside footprints (layer, text, board x,y; h text height)
C1M: Top Overlay "+" at 119.35,69.225 h1.52 r270
C8M: Bottom Overlay "+" at 85.6,63.724 h0.8 r180
C10M: Top Overlay "+" at 79.7,64.575 h1.52
NRF1M: Top Overlay "IRQ" at 113.5,56.25 h0.8; Top Overlay "MISO" at 112.7,57.55 h0.8; Top Overlay "MOSI" at 112.8,58.85 h0.8; Top Overlay "SCK" at 113.3,60.05 h0.8; Top Overlay "CSN" at 113.3,61.45 h0.8; Top Overlay "CE" at 114.1,62.65 h0.8; Top Overlay "GND" at 113.3,63.95 h0.8; Top Overlay "3.3V" at 112.6,65.25 h0.8